# Altium PCB pcb_case_bottom_C_x3_1_5mm.PcbDoc
Units mm, origin at the board's own origin, x right, y up, seen from the top; angles counter-clockwise.
Board outline 38 x 20.52 mm, 2 copper layers (Top Layer, Bottom Layer), stack 1.571 mm thick; 17 components, 14 nets, 60 pads, 0 vias.
Unrouted connection lines stored in the file: 29.
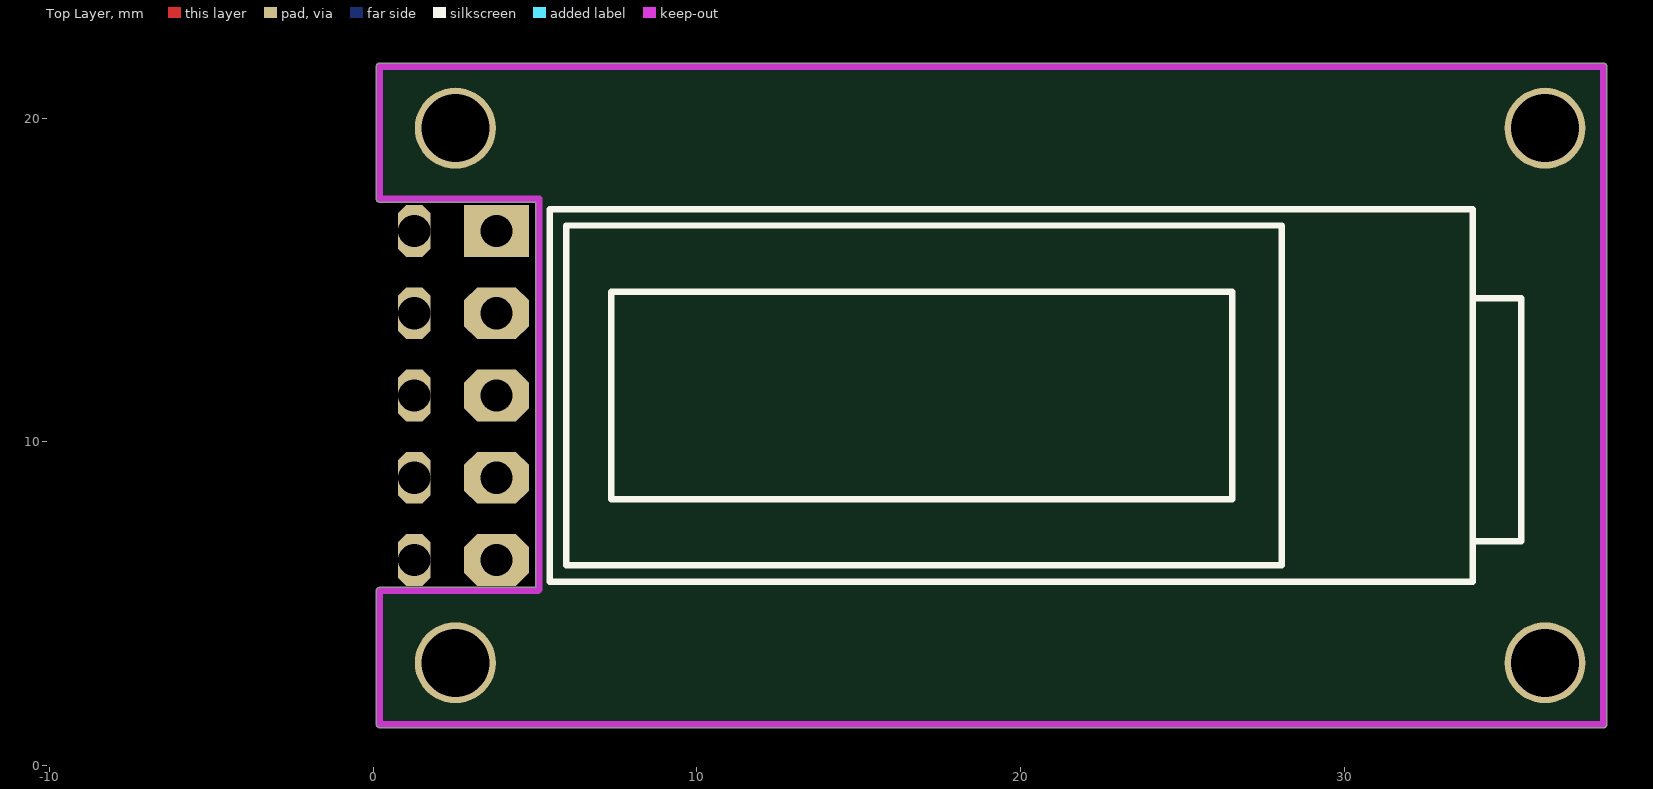
[diagram p0: Top Layer view]
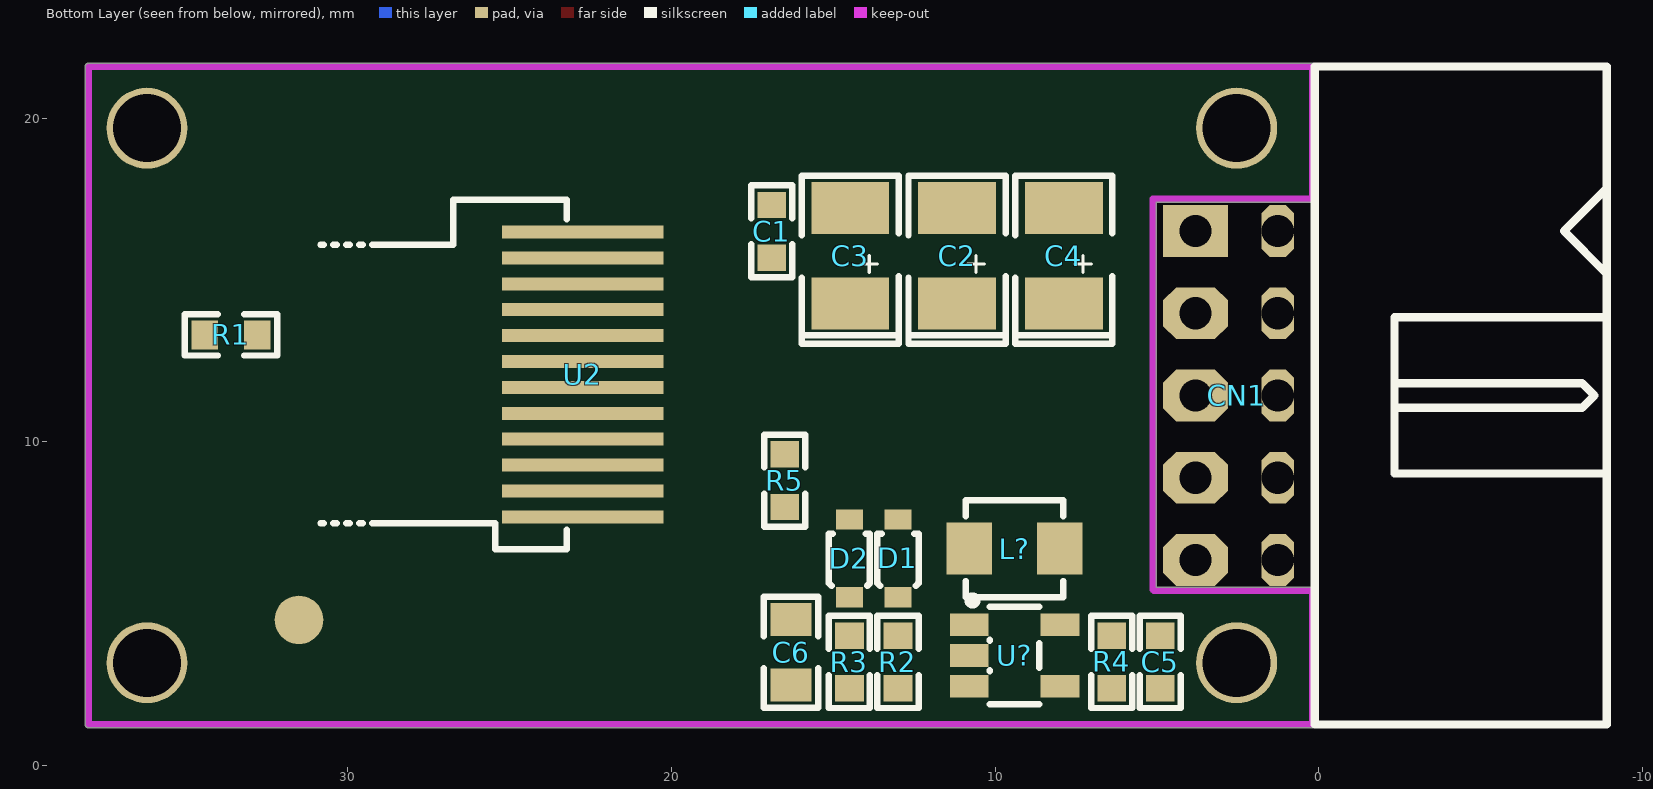
[diagram p1: Bottom Layer view, seen from below]

## Layer stack, top to bottom
Top Solder: solder mask 0.0102, Solder Resist, Dk 3.5
Top Layer: signal copper 0.0356
Dielectric1: dielectric 1.5, FR-4, Dk 4.8
Bottom Layer: signal copper 0.0356
Bottom Solder: solder mask 0.0102, Solder Resist, Dk 3.5

## Board outline
0.1,1.27 0.1,5.4 cw(c0.2,5.4) 0.2,5.5 5.025,5.5 5.025,17.4 0.2,17.4 cw(c0.2,17.5) 0.1,17.5 0.1,21.59 cw(c0.2,21.59) 0.2,21.69 38,21.69 cw(c38,21.59) 38.1,21.59 38.1,1.27 cw(c38,1.27) 38,1.17 0.2,1.17 cw(c0.2,1.27)

## Design rules (kind name [scope] priority, off if disabled: settings)
Clearance [All] p1: gap=0.2
FabricationTestPointUsage TestPointUsage [All] p1: valid=0 allowmultiple=FALSE
FabricationTestpoint Testpoint [All] p1: side=3 testpointundercomponent=TRUE minsize=1.016 maxsize=2.54 preferedsize=1.524 minholesize=0 maxholesize=1.016 preferedholesize=0.813 testpointgrid=0.025 allowsidetop=TRUE allowsidebottom=TRUE usegrid=TRUE gridtolerance=0
PolygonConnect [All] p1: connectstyle=Relief reliefconductorwidth=0.4 reliefentries=4 polygonreliefangle="90 Angle" airgapwidth=0.3
RoomDefinition sch [InComponentClass('sch')] p1: confinementstyle=ConfineIn formatcopy=TRUE lockcomponents=FALSE outline -72.39,-33.376 170.282,-33.376 170.282,59.233 -72.39,59.233
RoutingVias [All] p1: holewidth=0.711 width=1.27 viastyle="Through Hole" minholewidth=0.711 minwidth=1.27 maxholewidth=0.711 maxwidth=1.27
SolderMaskExpansion [All] p1: expansion=0.102
Width [All] p1: maxlimit=0.4 minlimit=0.25 preferedwidth=0.4 minimp=50.000000 maximp=50.000000 favimp=50.000000
28 further rules are at their usual default settings.

## Components (designator, comment, footprint, x,y, rotation, side; value= is the part's Value field where it differs from the comment)
C1 "100nF" C0603 16.9,16.5 r90 bottom
C2 "4,7uF/25V" SMDB 11.176,15.748 r270 bottom
C3 "4,7uF/25V" SMDB 14.478,15.748 r270 bottom
C4 "4,7uF/25V" SMDB 7.874,15.748 r270 bottom
C5 "4,7uF" C0603 4.9,3.2 r270 bottom
C6 "1uF" C0805 16.3,3.5 r90 bottom
CN1 "IDC Connector" IDC10_RA_1 3.81,16.51 r270 bottom
D1 "PMEG4005AEA" SOD323 13,6.4 r90 bottom
D2 "PMEG4005AEA" SOD323 14.5,6.4 r90 bottom
L? "10uH, 0,75A, 0R33" DLJ3015 9.4,6.7 r0 bottom
R1 "2MEG" R0603 33.6,13.3 r0 bottom
R2 "150k, 1%" R0603 13,3.2 r90 bottom
R3 "1M3, 1%" R0603 14.5,3.2 r270 bottom
R4 "10k" R0603 6.4,3.2 r270 bottom
R5 "10k" R0603 16.5,8.8 r270 bottom
U2 "DEP096032B-W" DEP096032B-W_2 22.86,11.43 r0 top
U? "LT1615ES5" SOT-23-5 9.4,3.4 r270 bottom

## Footprints (in the part's own frame and the unit in brackets; to place one, negate y for a bottom-side part, rotate by r counter-clockwise, add the part's x,y. Pads: shape width x height; smd on the part's side, far side on the other; paste and mask are expansions set on the pad)
C0603 [mil]
  rect 32x35 smd: 1(32,0) 2(-32,0)
  silkscreen extent -56,-25 56,25, body extent -31,-16 31,16, height 12
C0805 [mil]
  rect 40x50 smd: 1(-40,0) 2(40,0)
  silkscreen extent -68,-33 68,33, body extent -39,-25 39,25, height 31
DEP096032B-W_2 [mm]
  rect 5x0.4 smd far side: 1(-0.125,-3.75) 2(-0.125,-2.95) 3(-0.125,-2.15) 4(-0.125,-1.35) 5(-0.125,-0.55) 6(-0.125,0.25) 7(-0.125,1.05) 8(-0.125,1.85) 9(-0.125,2.65) 10(-0.125,3.45) 11(-0.125,4.25) 12(-0.125,5.05)
  silkscreen extent -17.4,-5.75 12.6,5.75, body extent -17.4,-5.75 11.1,5.75, height 1.42
DLJ3015 [mm] "DLJ Series Ultra Low Profile Power Inductor"
  rect 1.4x1.6 smd: 1(-1.4,0) 2(1.4,0)
  silkscreen extent -1.5,-1.5 1.5,1.5
IDC10_RA_1 [mm] "2.54mm, 10 Pin IDC Male Connector, Right Angle"
  rect 1.6x2 hole 1: 1(0,0)
  oct 1.6x1 hole 1: 2(0,2.54) 4(2.54,2.54) 6(5.08,2.54) 8(7.62,2.54) 10(10.16,2.54)
  oct 1.6x2 hole 1: 3(2.54,0) 5(5.08,0) 7(7.62,0) 9(10.16,0)
  silkscreen extent -5.08,3.68 15.24,12.7, body extent -5.06,-0.3 15.26,12.65, height 9.46
R0603 [mil]
  rect 32x35 smd: 1(32,0) 2(-32,0)
  silkscreen extent -56,-25 56,25, body extent -31,-16 32,16, height 12
SMDB [mm] "SMDB"
  rect 1.6x2.4 smd: 1(1.476,0) 2(-1.475,0)
  silkscreen extent -2.46,-1.5 2.72,1.5, body extent -1.75,-1.4 1.75,1.4, height 1.91
SOD323 [mm] "SC76"
  rect 0.63x0.83 smd: 1(1.2,0) 2(-1.2,0)
  silkscreen extent -0.85,-0.64 0.76,0.64, body extent -1.35,-0.62 1.35,0.63, height 1.1
SOT-23-5 [mm] ", AKA: SOT753 (NXP), TSOP5 (NXP)"
  rect 0.7x1.2 smd: 1(-0.95,-1.4) 2(0,-1.4) 3(0.95,-1.4) 4(0.95,1.4) 5(-0.95,1.4)
  silkscreen extent -1.82,-1.43 1.5,0.76, body extent -1.45,-1.4 1.45,1.4, height 1.14

## Part data
C1 C5 C6: library part Cap, "Capacitor"
C2 C3 C4: library part "Cap Pol Tant", "Polarized Tantalum Capacitor"
CN1: library part CN_5x2
D1 D2: "Schottky Diode 40V/0.5A (Farnell 8738025)"
L?: library part DLJ3015-10, "DLJ3015-10"
R1 R2 R3 R4 R5: library part Res, "Resistor"
U2: "DEP096032B-W OLED Display"
U?: "Micropower Step-Up  DC/DC Converter"

## Free pads (board coordinates)
  round 1.5 smd far side: 2(31.5,4.5)
  round 2.5 hole 2.1: 4(2.54,3.175) 4(2.54,19.685) 4(36.195,3.175) 4(36.195,19.685)

## Nets (pads, with @x,y where several pads share a name; then routed paths per layer and width w, separated by ;. In a path a pad name is that pad's centre, name@x,y a point inside that pad or via, vN(x,y) a via of type N, cw(c..) or ccw(c..) an arc to the next point about the centre after c; other vN are vias at no path point)
3V0: C1.2 C4.1 C5.2 CN1.2 L?.1 R4.2 U2.11 U?.5
12V: C3.1 C6.2 CN1.9 D1.2 D2.2 R3.2 U2.10
C\S\: CN1.8 U2.2
GND: C1.1 C2.2 C3.2 C4.2 C5.1 C6.1 CN1.1 R1.1 R2.1 R5.1 U2.1 U2.12 U?.2
NetC2_1: C2.1 U2.9
NetD1_1: D1.1 D2.1 L?.2 U?.1
NetR1_2: R1.2 U2.8
NetR2_2: R2.2 R3.1 U?.3
R\E\S\: CN1.7 R5.2 U2.3
S\H\D\N\: CN1.10 R4.1 U?.4
SA0: CN1.6 U2.4
SCL: CN1.5 U2.5
SDAIN: CN1.4 U2.6
SDAOUT: CN1.3 U2.7

## Keep-outs
Keep-Out Layer:
  lines w0.2: 5.125,8.5 5.125,13 ; 5.125,8.6 5.125,5.425 5.1,5.4 0.2,5.4 0.2,5.16 0.2,1.27 38,1.27 38,21.59 0.2,21.59 0.2,17.5 5.125,17.5 5.125,12.9

## Other copper
Bottom Layer:
  pour cut-out: 25,7.2 25,17 28.1,17 28.1,16.9 28.1,7.2
  pour cut-out: 7.9,5.2 7.9,8.2 10.9,8.2 10.9,5.2

## Silkscreen, mask and mechanical layers (free items; w line width, h text height)
Mechanical 16:
  lines w0.127: -121.16,-42 -116.08,-42 ; -121.16,6.26 -116.08,6.26 ; -121.16,54.52 -116.08,54.52 ; -48.135,-90.26 -48.135,-85.18 ; -48.135,97.7 -48.135,102.78 ; 16,-85.18 51.56,-85.18 165.86,-85.18 ; 24.89,-90.26 24.89,-85.18 ; 24.89,97.7 24.89,102.78 ; 45.947,-85.155 45.972,-85.18 ; 60.782,-85.166 60.782,-62.078 165.853,-62.078 ; 60.808,-69.596 165.827,-69.596 ; 60.833,-77.572 165.827,-77.572 ; 79.763,-85.166 79.763,-77.572 ; 79.783,-81.585 165.827,-81.585 ; 97.915,-90.26 97.915,-85.18 ; 97.915,97.7 97.915,102.78 ; 111.303,-85.115 111.303,-77.597 ; 140.233,-77.572 140.233,-62.078 ; 155.258,-69.596 155.258,-62.081 ; 165.86,-42 170.94,-42 ; 165.86,6.26 170.94,6.26 ; 165.86,54.52 170.94,54.52 ; 165.86,-85.18 -116.08,-85.18 -116.08,97.7 165.86,97.7 165.86,-59.907 165.86,-85.18 ; -121.16,-90.26 170.94,-90.26 170.94,102.78 -121.16,102.78 -121.16,-90.26
  text "1" at -84.914,99.351 h1.78
  text "2" at -12.27,99.351 h1.78
  text "3" at 60.882,99.351 h1.78
  text "4" at 133.78,99.351 h1.78
  text "A" at -119.255,76.339 h1.78
  text "A" at 167.765,76.339 h1.78
  text "B" at -119.255,28.282 h1.78
  text "B" at 167.765,28.282 h1.78
  text "C" at -119.255,-20.232 h1.78
  text "C" at 167.765,-20.232 h1.78
  text "PROJECT NAME:" at 61.697,-64.084 h1.14
  text "REVISION:" at 141.147,-64.084 h1.14
  text "A4" at 158.608,-67.156 h2.29
  text "Project_Name" at 86.283,-67.488 h2.54
  text "0.0.0" at 144.433,-67.931 h1.78
  text "D" at -119.255,-68.238 h1.78
  text "D" at 167.765,-68.238 h1.78
  text "PROJECT NUMBER:" at 141.122,-71.603 h1.14
  text "TITLE:" at 61.671,-71.679 h1.14
  text "PCB_TITLE" at 91.49,-75.641 h2.16
  text "ONW-000" at 148.608,-75.78 h1.78
  text "DATE:" at 61.798,-79.781 h1.14
  text "NAME_1" at 129.566,-80.265 h1.52
  text "X" at 90.985,-80.34 h1.52
  text "DRAWN BY:" at 112.37,-80.341 h1.52
  text "of" at 94.668,-80.416 h1.52
  text "Y" at 99.088,-80.416 h1.52
  text "SHEET" at 81.206,-80.442 h1.52
  text "DD-MM-YYYY" at 62.967,-83.896 h1.52
  text "NAME_2" at 129.592,-83.897 h1.52
  text "CHECKED BY:" at 112.345,-84.024 h1.52
  text ".PCB_FILE_NAME_NO_PATH" at 81.105,-84.049 h1.52
  text "1" at -84.914,-88.609 h1.78
  text "2" at -12.27,-88.609 h1.78
  text "3" at 60.882,-88.609 h1.78
  text "4" at 133.78,-88.609 h1.78